# Altium PCB pcb3d.PcbDoc
Units mm, origin at the board's own origin, x right, y up, seen from the top; angles counter-clockwise.
Board outline 75.69 x 75.31 mm, 2 copper layers (Top Layer, Bottom Layer); 27 components, 26 nets, 122 pads, 8 vias.
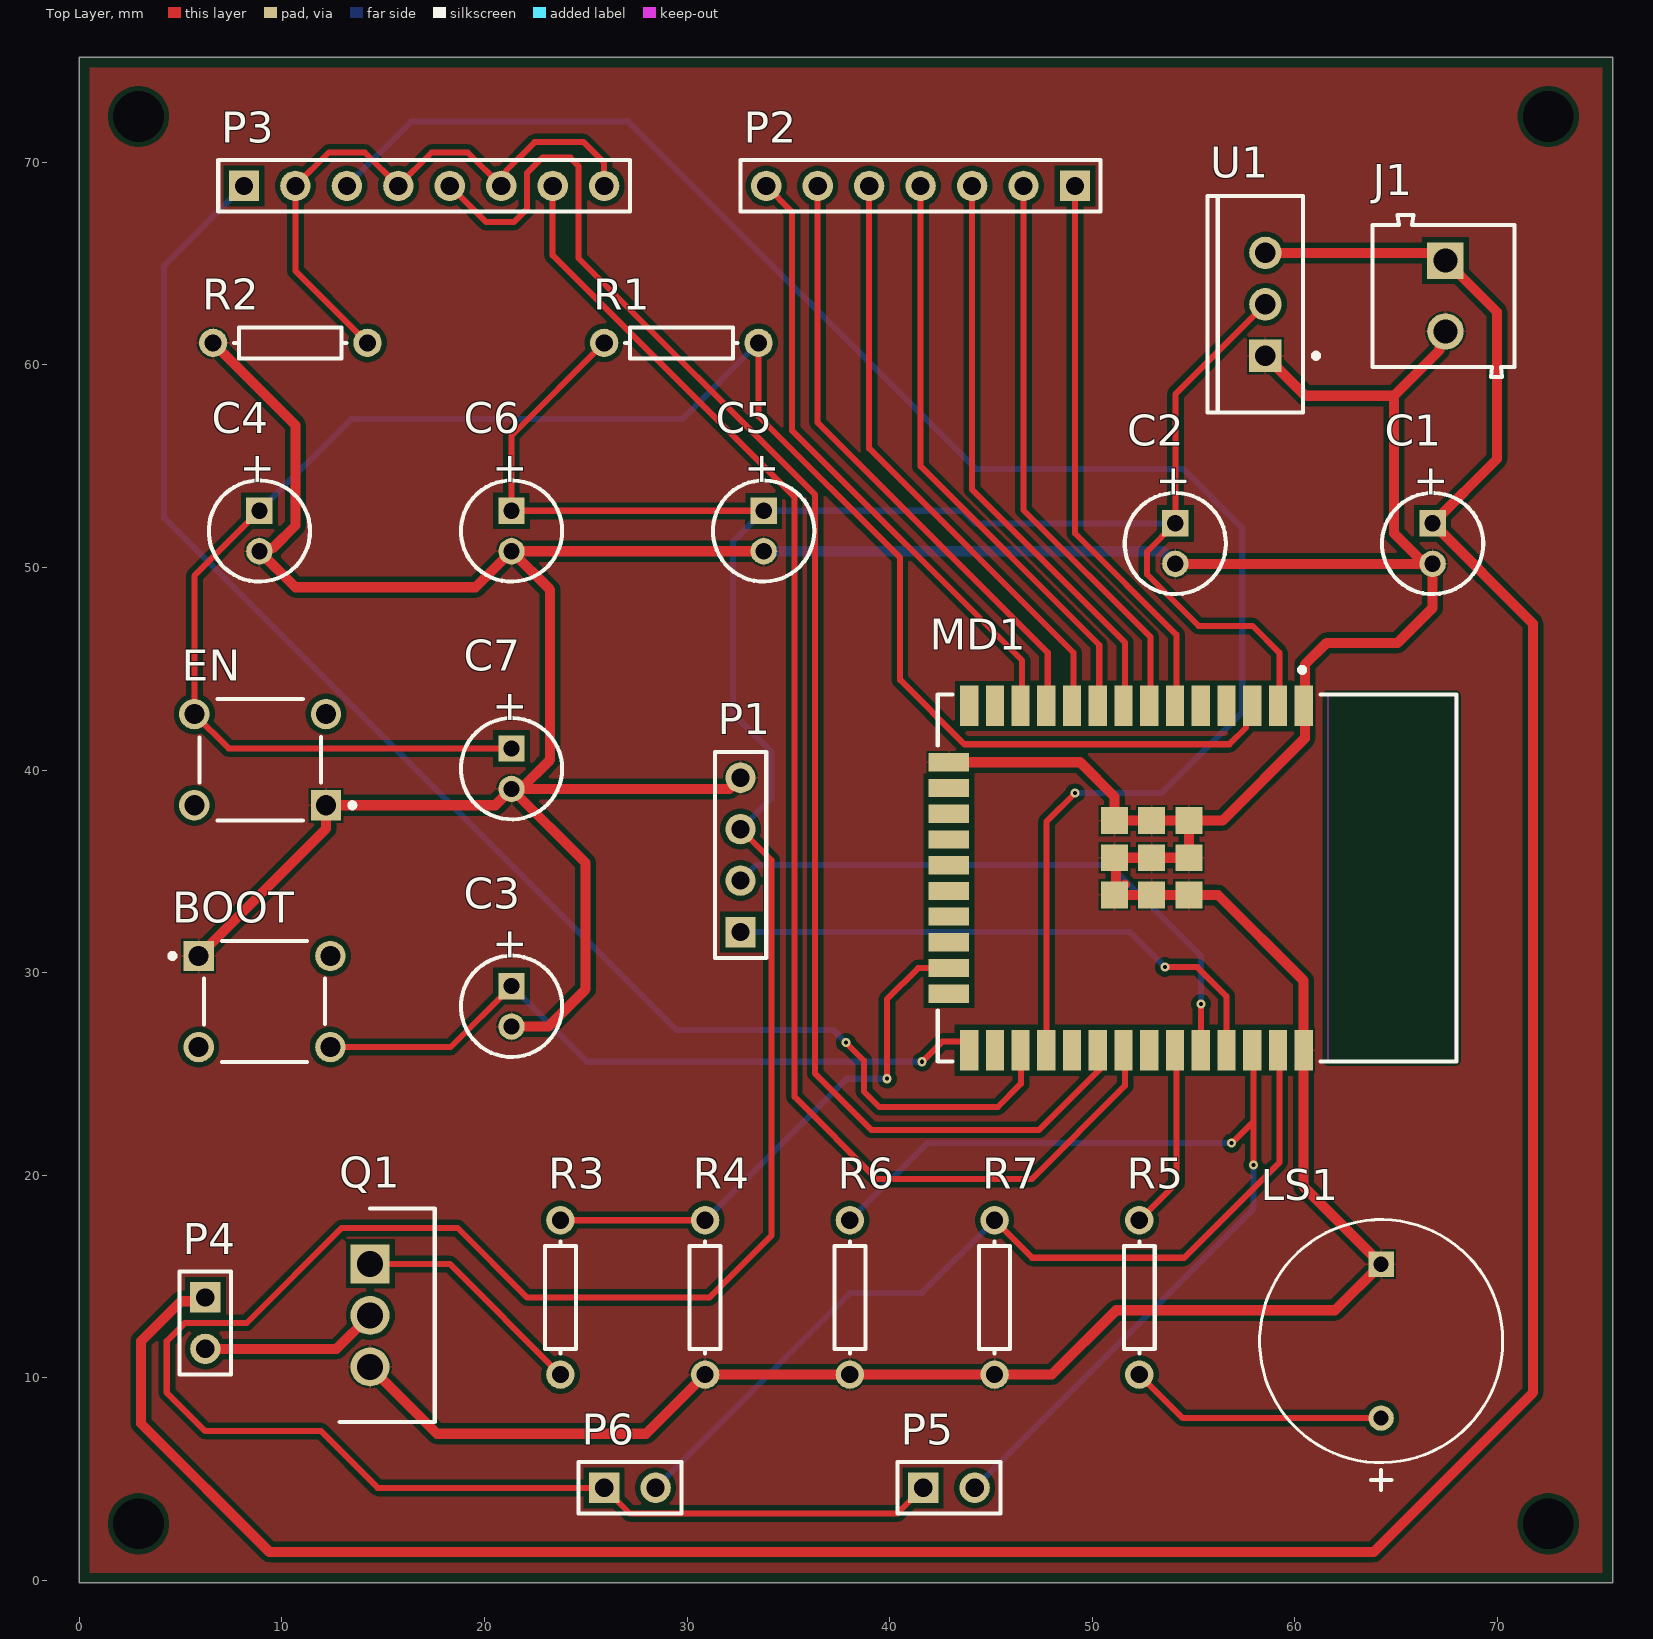
[diagram p0: Top Layer view]
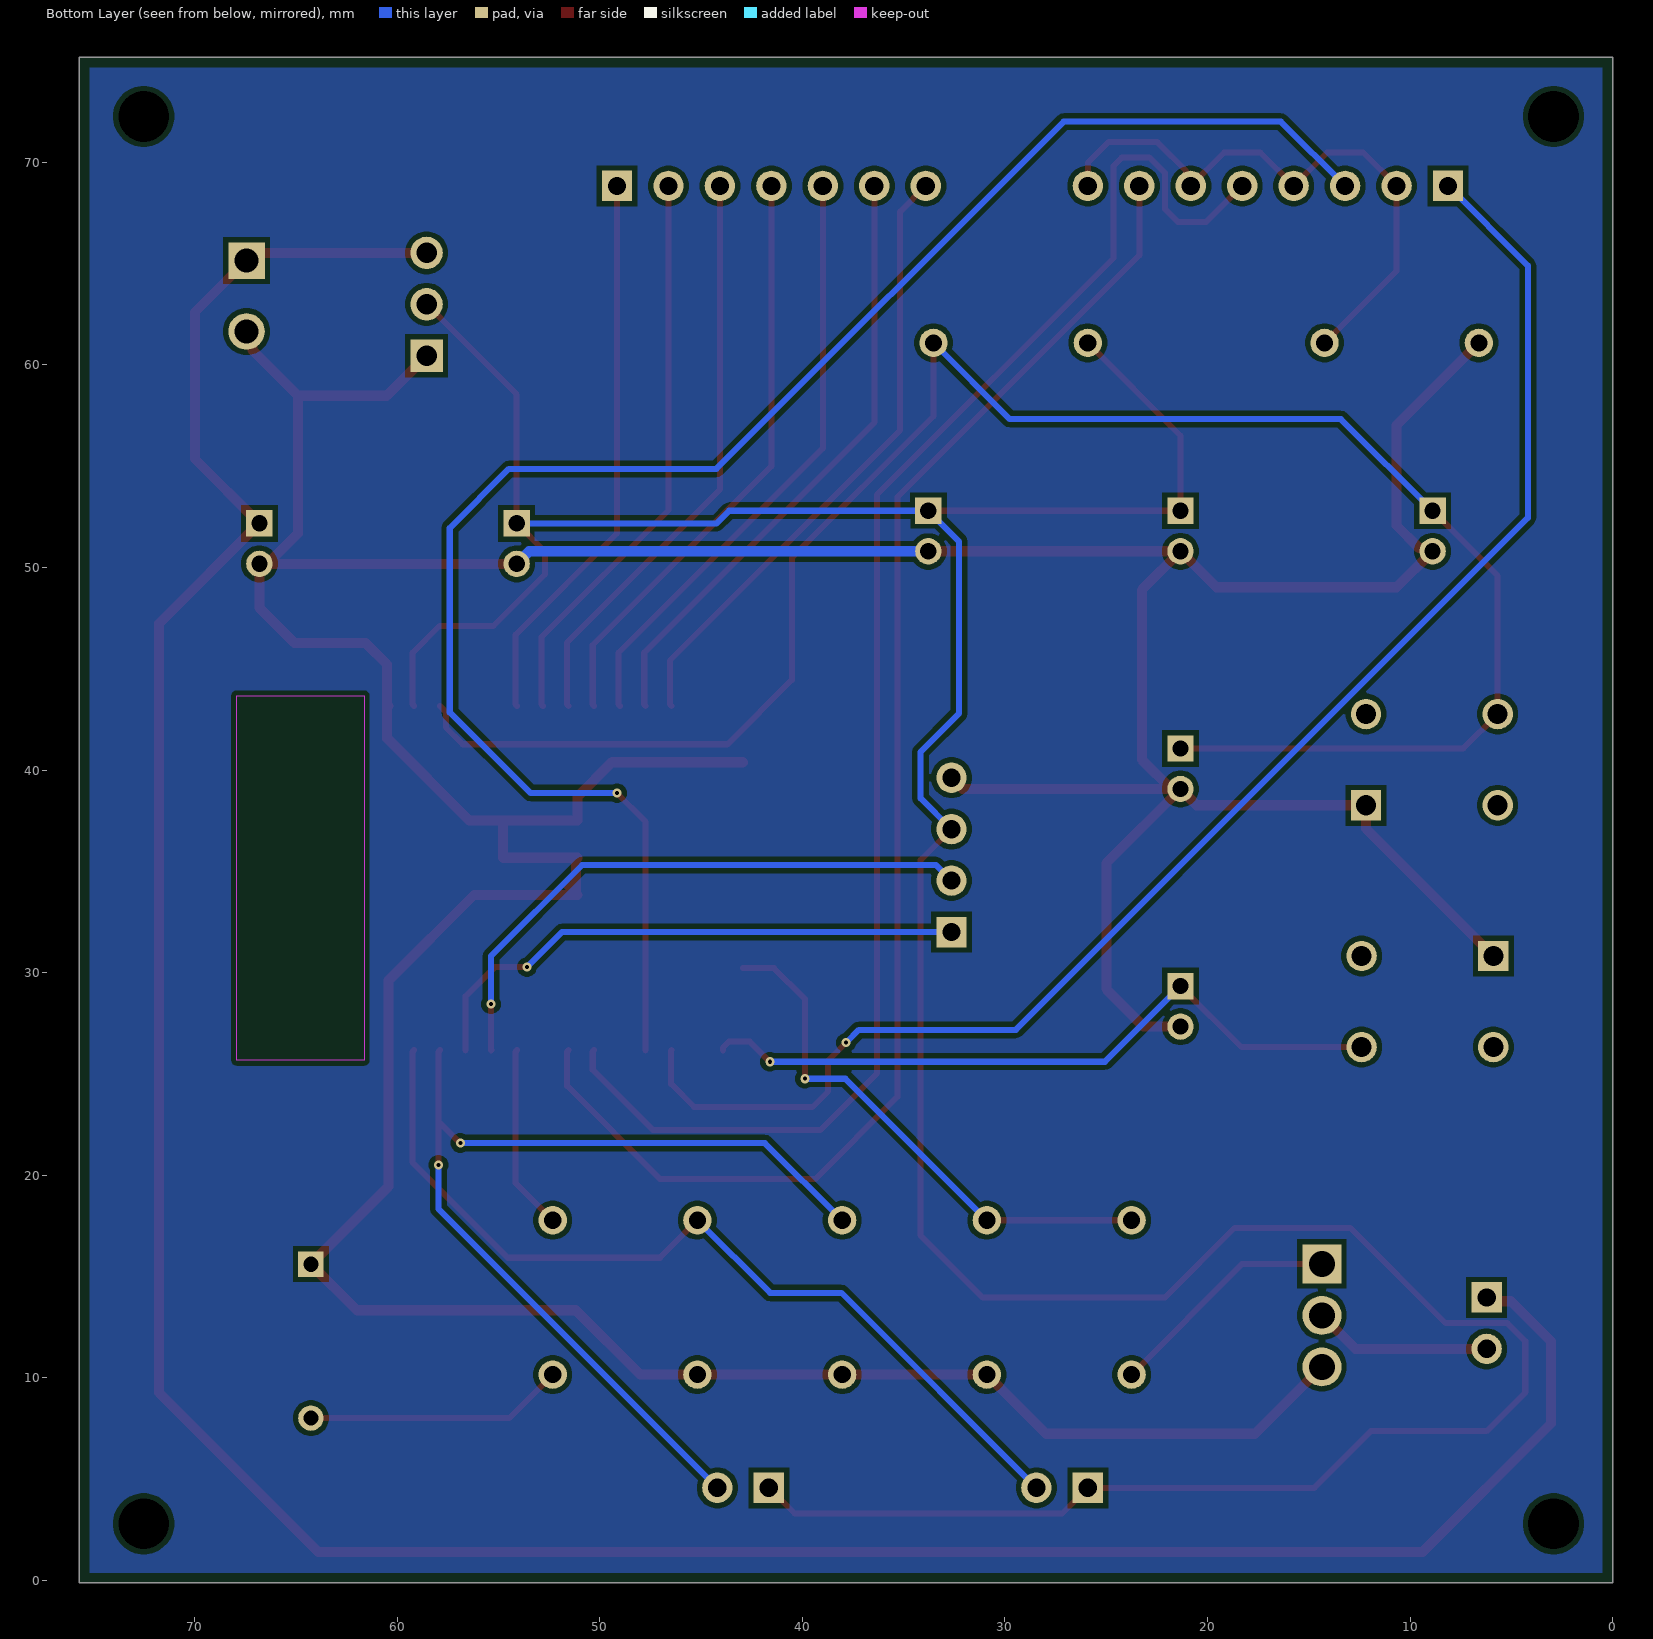
[diagram p1: Bottom Layer view, seen from below]

## Layer stack, top to bottom
Top Solder: solder mask 0.0102, Solder Resist, Dk 3.5
Top Layer: signal copper 0.0356
Dielectric 1: dielectric 0.32, FR-4, Dk 4.8
Bottom Layer: signal copper 0.0356
Bottom Solder: solder mask 0.0102, Solder Resist, Dk 3.5

## Board outline
0,-0.127 75.692,-0.127 75.692,75.184 0,75.184

## Design rules (kind name [scope] priority, off if disabled: settings)
BoardOutlineClearance [All] p1: gap=0.5 ignorepadtopadclearanceinfootprint=FALSE except(0.2: Text-OutlineEdge Text-CavityEdge Text-CutoutEdge Text-SplitBarrior Text-SplitContinuation)
Clearance [All] p1: gap=0.25 ignorepadtopadclearanceinfootprint=FALSE
ComponentClearance [All] p1: gap=0.102 collisioncheckmode=3 verticalgap=0.102 showdistances=TRUE donotcheckwithout3dbody=TRUE
DiffPairsRouting [All] p1: maxlimit=0.102 minlimit=0.102 mostfreqgap=0.102 toplayer_minwidth=0.102 toplayer_maxwidth=1816.048 toplayer_prefwidth=0.102 bottomlayer_minwidth=0.102 bottomlayer_maxwidth=1816.048 bottomlayer_prefwidth=0.102 maxuncoupledlength=12.7
Height [All] p1: minheight=0 maxheight=1816.048 prefheight=12.7
HoleSize [All] p1: absolutevalues=TRUE maxlimit=6.3 minlimit=0.2 maxpercent=80.000 minpercent=20.000
HoleToHoleClearance [All] p1: gap=0.25 allowstackedmicrovias=FALSE
MinimumAnnularRing [All] p1: minimumring=0.076
MinimumSolderMaskSliver [All] p1: minsoldermaskwidth=0
PlaneClearance [All] p1: clearance=0.102
PlaneConnect PlaneConnectPowerPads [InPadClass('PowerPads')] p1: planeconnectstyle=Direct reliefexpansion=0.508 reliefentries=4 reliefconductorwidth=0.254 reliefairgap=0.254
PlaneConnect [All] p2: pad.planeconnectstyle=Relief pad.reliefexpansion=0.3 pad.reliefentries=4 pad.reliefconductorwidth=0.102 pad.reliefairgap=0.102 via.planeconnectstyle=Direct via.reliefexpansion=0.3 via.reliefentries=4 via.reliefconductorwidth=0.127 via.reliefairgap=0.127
PolygonConnect PolygonConnectPowerPads [All vs (InPadClass('PowerPads'))] p1: connectstyle=Direct reliefconductorwidth=0.254 reliefentries=4 polygonreliefangle="90 Angle" airgapwidth=0.254
PolygonConnect [All] p2: thpad.connectstyle=Relief thpad.reliefconductorwidth=0.102 thpad.reliefentries=4 thpad.polygonreliefangle="90 Angle" thpad.airgapwidth=0.102 smdpad.connectstyle=Relief smdpad.reliefconductorwidth=0.102 smdpad.reliefentries=4 smdpad.polygonreliefangle="90 Angle" smdpad.airgapwidth=0.102 via.connectstyle=Direct via.reliefconductorwidth=0.127 via.reliefentries=4 via.polygonreliefangle="90 Angle" via.airgapwidth=0.127
RoutingVias [All] p1: holewidth=0.2 width=0.45 viastyle="Through Hole" minholewidth=0.2 minwidth=0.45 maxholewidth=6.3 maxwidth=6.55
SilkToSilkClearance [All] p1: silktosilkclearance=0
SilkToSolderMaskClearance [IsPad] p1: minsilkscreentomaskgap=0.102 clearancetoexposedcopper=TRUE
SolderMaskExpansion [All] p1: expansion=0.075 istentingtop=FALSE
Width [All] p1: maxlimit=1816.048 minlimit=0.102 preferedwidth=0.3 minimp=50.000000 maximp=50.000000 favimp=50.000000
20 further rules are at their usual default settings.

## Components (designator, comment, footprint, x,y, rotation, side; value= is the part's Value field where it differs from the comment)
BOOT "1825910-6" TECO-1825910-6_V 9.144,28.575 r0 top
C1 "22uF" CAPPR55-200-1100X500X1200 66.802,51.181 r270 top
C2 "22uF" CAPPR55-200-1100X500X1200 54.102,51.181 r270 top
C3 "0.1uF" CAPPR55-200-1100X500X1200 21.336,28.337 r270 top
C4 "0.1uF" CAPPR55-200-1100X500X1200 8.89,51.8 r270 top
C5 "22uF" CAPPR55-200-1100X500X1200 33.782,51.8 r270 top
C6 "0.1uF" CAPPR55-200-1100X500X1200 21.336,51.8 r270 top
C7 "1uF" CAPPR55-200-1100X500X1200 21.336,40.069 r270 top
EN "1825910-6" TECO-1825910-6_V 8.927,40.513 r180 top
J1 "Power in" 691103110002 67.337,63.401 r270 top
LS1 "Buzzer" FP-MCKPX-G1203A-K4056-MFG 64.262,11.811 r270 top
MD1 "ESP32-WROOM-32D" FP-ESP32-WROOM-32D-MFG 55.176,34.671 r270 top
P1 "FTDI" HDR1X4 32.639,32.004 r90 top
P2 "Keypad" HDR1X7 49.149,68.834 r180 top
P3 "LEDs" HDR1X8 8.128,68.834 r0 top
P4 "LOCK" HDR1X2 6.223,13.97 r270 top
P5 "PW reset button" HDR1X2 41.656,4.572 r0 top
P6 "WiFi config button" HDR1X2 25.908,4.572 r0 top
Q1 "IRL520NPBF" TO254P469X1042X1967-3P 14.351,15.621 r270 top
R1 "" AXIAL-0.3 29.718,61.087 r180 top value=10k
R2 "330" AXIAL-0.3 10.414,61.087 r180 top
R3 "" AXIAL-0.3 23.749,13.97 r90 top value=220
R4 "" AXIAL-0.3 30.893,13.97 r90 top value=100k
R5 "" AXIAL-0.3 52.324,13.97 r270 top value=220
R6 "" AXIAL-0.3 38.036,13.97 r270 top value=10k
R7 "" AXIAL-0.3 45.18,13.97 r270 top value=10k
U1 "LM1117T-3.3/NOPB" NDE0003A 58.547,62.992 r90 top

## Footprints (in the part's own frame and the unit in brackets; to place one, negate y for a bottom-side part, rotate by r counter-clockwise, add the part's x,y. Pads: shape width x height; smd on the part's side, far side on the other; paste and mask are expansions set on the pad)
691103110002 [mm] "3,50mm - modular - blue - Horizontal wire entry - Pressure clamp - 8,4mm height - 02p"
  rect 1.8x1.8 hole 1.2: 1(-1.75,0.1)
  round 1.8 hole 1.2: 2(1.75,0.1)
  silkscreen extent -4,-3.5 4,3.5, body extent -4,-3.5 4,3.5, height 8.45
AXIAL-0.3 [mm] "Axial Device, Thru-Hole; 2 Leads; 0.3 in Pin Spacing"
  round 1.4 hole 0.85: 1(-3.81,0) 2(3.81,0)
  silkscreen extent -2.77,-0.76 2.77,0.76
CAPPR55-200-1100X500X1200 [mm] "THD, 2-Leads, Dia 5mm, Body Length 11mm"
  rect 1.3x1.3 hole 0.8: 1(-1,0)
  round 1.3 hole 0.8: 2(1,0)
  silkscreen extent -2.5,-2.5 2.5,2.5, body extent -2.5,-2.5 2.5,2.5, height 12
FP-ESP32-WROOM-32D-MFG [mm]
  rect 2x0.9 smd paste+0 mask+0: 1(-8.5,5.26) 2(-8.5,3.99) 3(-8.5,2.72) 4(-8.5,1.45) 5(-8.5,0.18) 6(-8.5,-1.09) 7(-8.5,-2.36) 8(-8.5,-3.63) 9(-8.5,-4.9) 10(-8.5,-6.17) 11(-8.5,-7.44) 12(-8.5,-8.71) 13(-8.5,-9.98) 14(-8.5,-11.25) 25(8.5,-11.25) 26(8.5,-9.98) 27(8.5,-8.71) 28(8.5,-7.44) 29(8.5,-6.17) 30(8.5,-4.9) 31(8.5,-3.63) 32(8.5,-2.36) 33(8.5,-1.09) 34(8.5,0.18) 35(8.5,1.45) 36(8.5,2.72) 37(8.5,3.99) 38(8.5,5.26)
  rect 0.9x2 smd paste+0 mask+0: 15(-5.715,-12.25) 16(-4.445,-12.25) 17(-3.175,-12.25) 18(-1.905,-12.25) 19(-0.635,-12.25) 20(0.635,-12.25) 21(1.905,-12.25) 22(3.175,-12.25) 23(4.445,-12.25) 24(5.715,-12.25)
  rect 1.33x1.33 smd paste+0 mask+0: 39(-2.835,-0.405) 39(-2.835,-2.24) 39(-2.835,-4.075) 39(-1,-0.405) 39(-1,-2.24) 39(-1,-4.075) 39(0.835,-0.405) 39(0.835,-2.24) 39(0.835,-4.075)
  Keep-Out Layer region: -9,6.45 9,6.45 9,12.75 -9,12.75
  Keep-Out Layer region: -9,6.45 9,6.45 9,12.75 -9,12.75
  silkscreen extent -10.4,-12.8 9.05,12.8, body extent -9.6,-13.35 9.6,12.9, height 0.25
FP-MCKPX-G1203A-K4056-MFG [mm]
  rect 1.25x1.25 hole 0.75 paste-1000 mask+0: 1(-3.8,0)
  round 1.25 hole 0.75 paste-1000 mask+0: 2(3.8,0)
  silkscreen extent -6,-6 7.35,6, body extent -6.1,-6.1 6.1,6.1, height 0.25
HDR1X2 [mm] "Connector; Header; 2 Position"
  rect 1.5x1.5 hole 0.9: 1(0,0)
  round 1.5 hole 0.9: 2(2.54,0)
  silkscreen extent -1.27,-1.27 3.81,1.27
HDR1X4 [mm] "Connector; Header; 4 Position"
  rect 1.5x1.5 hole 0.9: 1(0,0)
  round 1.5 hole 0.9: 2(2.54,0) 3(5.08,0) 4(7.62,0)
  silkscreen extent -1.27,-1.27 8.89,1.27
HDR1X7 [mm] "Connector; Header; 7 Position"
  rect 1.5x1.5 hole 0.9: 1(0,0)
  round 1.5 hole 0.9: 2(2.54,0) 3(5.08,0) 4(7.62,0) 5(10.16,0) 6(12.7,0) 7(15.24,0)
  silkscreen extent -1.27,-1.27 16.51,1.27
HDR1X8 [mm] "Connector; Header; 8 Position"
  rect 1.5x1.5 hole 0.9: 1(0,0)
  round 1.5 hole 0.9: 2(2.54,0) 3(5.08,0) 4(7.62,0) 5(10.16,0) 6(12.7,0) 7(15.24,0) 8(17.78,0)
  silkscreen extent -1.27,-1.27 19.05,1.27
NDE0003A [mm] "FM, 3-Leads, Body 10.7x4.7mm, Pitch 2.54mm"
  rect 1.6x1.6 hole 1: 1(-2.54,0)
  round 1.6 hole 1: 2(0,0) 3(2.54,0)
  silkscreen extent -5.35,-2.63 5.35,2.85, body extent -5.4,-1.9 5.4,2.9, height 19.4
TECO-1825910-6_V [mm] "Switch, 4-Leads, Body 5.99x5.99mm"
  rect 1.5x1.5 hole 0.99: 1(-3.25,2.25)
  round 1.5 hole 0.99: 2(3.25,2.25) 3(-3.25,-2.25) 4(3.25,-2.25)
  silkscreen extent -4.67,-3 3,3, body extent -3,-2.99 2.99,3, height 5
TO254P469X1042X1967-3P [mm]
  rect 1.92x1.92 hole 1.28: 1(0,0)
  round 1.92 hole 1.28: 2(2.54,0) 3(5.08,0)
  silkscreen extent -2.73,-1.49 7.81,3.2, body extent -2.67,-1.5 7.75,3.19, height 18.84

## Part data
BOOT EN: library part CMP-1684-00021-1, "Tact Switch, SPST-NO, 0.05 A, -35 to 85 degC, 4-Pin THD, RoHS, Bulk", Actuator Color=Black, Contact Rating @ Voltage=0.05A@24VDC, Dielectric Strength=500VAC, Manufacturer="TE Connectivity", Maximum AC Voltage Rating=N/A, Maximum Contact Resistance=100mOhm, Maximum DC Voltage Rating=24V, Minimum Insulation Resistance=100MOhm, Operating Temperature=-35to85C, Package Description="4-Pin Through Hole Device, Body 5.99 x 5.99 mm, Pitch 6.5 mm", Package Reference=THD, Actuator Length=1.4mm, Actuator Material=PolybutyleneTerephthalate, Actuator Style=RoundButton, Base Material=N/A, Body Orientation=Straight, Bushing Type=Unthreaded, Contact Material=CopperAlloy, Contact Plating=Silver, Datasheet URL=http://www.te.com/commerce/DocumentDelivery/DDEController?Action=showdoc&DocId=Customer+Drawing%7F1825910%7FC9%7Fpdf%7FEnglish%7FENG_CD_1825910_C9.pdf%7F1825910-6, Datasheet Version="Rev. C9", Dimension=5.99x5mm, Electrical Life=100000Cycles, Family=1825910, Function=MomentaryContact, Housing Material=N/A, Illumination=N/R, Manufacturer URL=http://www.te.com, Mechanical Life=100000Cycles, Mounting=ThroughHole, Packaging=N/A, Part No=1825910-6, Pole Throw Configuration=SPST, Product Weight=N/A, RoHS=Yes, Seal Description=N/A, Seal Location=N/A, Switch Configuration=OFF(ON), Terminal Type=PCPins, Thread Size=N/R
C1 C2 C5: library part CMP-1665-00036-2, "Aluminum Electrolytic Capacitor, 22 uF, +/- 20%, 50 V, -40 to 85 degC, 2-Pin THD, RoHS, Bulk", Case/Package=Radial, Leakage Current=3uA, Manufacturer=Panasonic, Max Operating Temperature=85degC, Min Operating Temperature=-40degC, Package Description="2-Pin Radial Lead, Dia 5 mm, Height 12 mm", Package Quantity=200, Package Reference=CAPPR55-200-1100X500X1200, Ripple Current=100mA, Tolerance=20%, Voltage=50V, Capacitance=22uF, Datasheet URL=https://industrial.panasonic.com/cdbs/www-data/pdf/RDF0000/ABA0000C1218.pdf, Datasheet Version="Rev. 05, 10/2016", Diameter=5mm, Dissipation Factor=0.12%, Height=11mm, Height - Seated (Max)=0.472inch, Lead Diameter=0.5mm, Lead Pitch=2mm, Lead/Base Style=Straight, Length=11mm, Life (Hours)=2000Hour, Manufacturer URL=http://www.panasonic.com/, Mount=ThroughHole, Packaging=Bulk, Radiation Hardening=No, REACH SVHC=NoSVHC, Ripple Current (AC)=100mA, RoHSCompliant=true, Termination=Radial, Voltage Rating=50V, Voltage Rating (DC)=50V
C3 C4 C6 C7: library part CMP-1665-00036-2, "Aluminum Electrolytic Capacitor, 22 uF, +/- 20%, 50 V, -40 to 85 degC, 2-Pin THD, RoHS, Bulk", Capacitance=22uF, Case/Package=Radial, Leakage Current=3uA, Manufacturer=Panasonic, Max Operating Temperature=85degC, Min Operating Temperature=-40degC, Package Description="2-Pin Radial Lead, Dia 5 mm, Height 12 mm", Package Quantity=200, Package Reference=CAPPR55-200-1100X500X1200, Ripple Current=100mA, Tolerance=20%, Voltage=50V, Datasheet URL=https://industrial.panasonic.com/cdbs/www-data/pdf/RDF0000/ABA0000C1218.pdf, Datasheet Version="Rev. 05, 10/2016", Diameter=5mm, Dissipation Factor=0.12%, Height=11mm, Height - Seated (Max)=0.472inch, Lead Diameter=0.5mm, Lead Pitch=2mm, Lead/Base Style=Straight, Length=11mm, Life (Hours)=2000Hour, Manufacturer URL=http://www.panasonic.com/, Mount=ThroughHole, Packaging=Bulk, Radiation Hardening=No, REACH SVHC=NoSVHC, Ripple Current (AC)=100mA, RoHSCompliant=true, Termination=Radial, Voltage Rating=50V, Voltage Rating (DC)=50V
J1: library part CMP-1502-03254-1, "Series 1031 - 3.50 mm Horizontal Entry Modular with Pressure Clamp WR-TBL, 2 pin", Manufacturer="Wurth Elektronik", Operating Temperature=-40to105degC, Package Reference=691103110002, Datasheet URL=http://katalog.we-online.de/em/datasheet/6911031100xx.pdf, Manufacturer URL=http://www.we-online.de, Mounting Technology=THT, Packaging=Box, Part Number=691103110002, Pin Number=2, Pitch=3.50mm, Publisher=WurthElektronik
LS1: library part CMP-12433-000001-1, "MAGNETIC BUZZER AND TRANSDUCER - More Details", Current=30mA, Frequency=2300Hz, Manufacturer="Multicomp Pro", Manufacturer Part Number=MCKPX-G1203A-K4056, Max Supply Voltage=5V, Min Supply Voltage=2V, Operating Supply Voltage=3V, Package=0, Temperature="-20°C to +70°C", Temperature Range High=+70°C, Temperature Range Low=-20°C, Automotive=No, Category=Speak, ComponentLink2Description=Datasheet, ComponentLink2URL=http://www.farnell.com/datasheets/1498149.pdf?_ga=2.17855225.1157923166.1572356775-536200964.1569240579, Device Class L1=Electromechanical, Device Class L2="Audio Products", Device Class L3=Buzzers, Height=9.5mm, Lead Free=Yes, Octopart=https://octopart.com/mckpx-g1203a-k4056-multicomp-12157154, RoHS=TRUE, Standoff Height=0.5mm
MD1: library part CMP-194065-000003-1, "WIFI MODULE 32MBITS SPI FLASH", Manufacturer="Espressif Systems", Max Frequency=2484MHz, Max Supply Voltage=3.6V, Min Supply Voltage=3V, Nominal Supply Current=500mA, Temperature="-40°C to +85°C", Temperature Range High=+85°C, Temperature Range Low=-40°C, Automotive=No, Bandwidth=72MHz, Category=UNK, ComponentLink2Description=Datasheet, ComponentLink2URL=https://www.espressif.com/sites/default/files/documentation/esp32-wroom-32d_esp32-wroom-32u_datasheet_en.pdf, Data Rate=150Mbits/s, Device Class L1="Integrated Circuits (ICs)", Device Class L2="RF Semiconductors and Devices", Device Class L3=Transceivers, Digikey Description="WIFI MODULE 32MBITS SPI FLASH", Height=3.2mm, Interface=I2C,SPI,UART,Ethernet,I2S,Other, Lead Free=Yes, Manufacturer Part Number=ESP32-WROOM-32D, Mouser Description="Wi-Fi/BT BLE Module ESP32-D0WD, SPI Flash, UART, P", Number Of Adc Channels=16, Number Of Gpio=32, Octopart=https://octopart.com/esp32-wroom-32d-espressif+systems-91040050, Package=ESP32-WROOM-32D, RoHS=TRUE, Sensitivity=-98dBm
P1: library part "Header 4", "Header, 4-Pin", LatestRevisionDate=17-Jul-2002, LatestRevisionNote="Re-released for DXP Platform.", Publisher="Altium Limited"
P2: library part "Header 7", "Header, 7-Pin", LatestRevisionDate=17-Jul-2002, LatestRevisionNote="Re-released for DXP Platform.", Publisher="Altium Limited"
P3: library part "Header 8", "Header, 8-Pin", LatestRevisionDate=17-Jul-2002, LatestRevisionNote="Re-released for DXP Platform.", Publisher="Altium Limited"
P4 P5 P6: library part "Header 2", "Header, 2-Pin", LatestRevisionDate=17-Jul-2002, LatestRevisionNote="Re-released for DXP Platform.", Publisher="Altium Limited"
Q1: "MOSFET (N-Channel)", Manufacturer_Name=Infineon, Mouser Part Number=942-IRL520NPBF, Arrow Part Number=IRL520NPBF, Arrow Price/Stock=https://www.arrow.com/en/products/irl520npbf/infineon-technologies-ag?region=nac, Datasheet Link=https://www.infineon.com/dgdl/irl520npbf.pdf?fileId=5546d462533600a40153565f9b62255b, Height=4.69mm, Manufacturer_Part_Number=IRL520NPBF, Mouser Price/Stock=https://www.mouser.co.uk/ProductDetail/Infineon-Technologies/IRL520NPBF?qs=9%252BKlkBgLFf3eZ5ppEpIaKQ%3D%3D
R1 R2 R3 R4 R5 R6 R7: library part Res1, "Resistor", LatestRevisionDate=17-Jul-2002, LatestRevisionNote="Re-released for DXP Platform.", PackageDescription="Axial Device, Thru-Hole; 2 Leads; 0.3 in Pin Spacing", PackageReference=AXIAL-0.3, Published=8-Jun-2000, Publisher="Altium Limited"
U1: library part CMP-0062-02494-3, "800mA Low-Dropout Linear Regulator, 3-pin TO-220, Pb-Free", Manufacturer="Texas Instruments", PackageTopMarking=NSUZXYTTE#*LM1117T*3.3, PowerWise=N, ComponentLink1Description="Datasheet URL", ComponentLink1URL=http://www.ti.com/general/docs/lit/getliterature.tsp?genericPartNumber=LM1117-N&fileType=pdf, CompType="LDO IC", PackageDescription="TO-220, Molded, 3 Lead, Straight", PackageReference=NDE0003A, PinCount=3, RoHS=Y

## Free pads (board coordinates)
  round 0 hole 2.5: 2(2.921,72.263) 3(72.517,72.263) 4(72.517,2.794) 5(2.921,2.794)

## Via types
v1: diameter 0.45, hole 0.2, Top Layer to Bottom Layer, 8 vias

## Nets (pads, with @x,y where several pads share a name; then routed paths per layer and width w, separated by ;. In a path a pad name is that pad's centre, name@x,y a point inside that pad or via, vN(x,y) a via of type N, cw(c..) or ccw(c..) an arc to the next point about the centre after c; other vN are vias at no path point)
3V3: C2.1 C5.1 C6.1 MD1.2 P1.3 P5.1 P6.1 R1.2 U1.2 | length 185.9
  Top Layer w0.3: R1.2 21.336,56.515 C6.1 C5.1 ; P1.3 34.163,35.56 34.163,17.018 31.115,13.97 22.098,13.97 18.669,17.399 12.954,17.399 8.255,12.7 5.207,12.7 4.318,11.811 4.318,9.271 6.223,7.366 11.938,7.366 14.732,4.572 P6.1 27.178,3.302 40.386,3.302 P5.1 ; U1.2 54.102,58.547 C2.1 52.705,50.784 52.705,49.657 55.245,47.117 57.912,47.117 59.235,45.794 59.235,43.24 MD1.2
  Bottom Layer w0.3: P1.3 34.163,38.608 34.163,40.894 32.258,42.799 32.258,51.276 C5.1 43.612,52.8 44.231,52.181 C2.1
BOOT: BOOT.4 C3.1 MD1.25 | length 35
  Top Layer w0.3: BOOT.4 18.324,26.325 C3.1 ; v1(41.605,25.603) 42.596,26.594 43.626,26.594 43.926,26.294 MD1.25
  Bottom Layer w0.3: C3.1 25.07,25.603 v1(41.605,25.603)
BUZZER: MD1.33 R5.1 | length 9.2
  Top Layer w0.3: R5.1 54.155,19.611 54.155,26.102 MD1.33
C1: MD1.10 P2.5 | length 29.9
  Top Layer w0.3: P2.5 38.989,55.88 49.075,45.794 49.075,43.24 MD1.10
C2: MD1.11 P2.6 | length 30.4
  Top Layer w0.3: P2.6 36.449,57.15 47.805,45.794 47.805,43.24 MD1.11
C3: MD1.12 P2.7 | length 30.9
  Top Layer w0.3: P2.7 35.179,67.564 35.179,56.769 46.535,45.413 46.535,43.24 MD1.12
EN: C4.1 C7.1 EN.4 MD1.3 R1.1 | length 95.3
  Top Layer w0.3: C4.1 5.677,49.587 EN.4 7.371,41.068 C7.1 ; R1.1 33.528,57.455 40.513,50.47 40.513,44.45 43.688,41.275 56.769,41.275 57.596,42.102 57.596,42.871 MD1.3
  Bottom Layer w0.3: C4.1 13.418,57.328 29.769,57.328 R1.1
GND: BOOT.1 C1.2 C2.2 C3.2 C4.2 C5.2 C6.2 C7.2 EN.1 J1.2 LS1.1 MD1.1 MD1.15 MD1.38 MD1.39 P1.4 Q1.3 R2.2 R4.1 R6.2 R7.2 U1.1 | length 276.9
  Top Layer w0.5: BOOT.1 12.177,37.108 EN.1 20.531,38.263 C7.2 ; R2.2 10.668,57.023 10.668,52.07 9.551,50.953 9.043,50.953 C4.2 10.668,49.022 19.558,49.022 C6.2 ; Q1.3 17.653,7.239 27.972,7.239 R4.1 R6.2 R7.2 48.006,10.16 51.181,13.335 61.986,13.335 LS1.1 60.436,19.437 60.436,29.607 56.207,33.836 52.936,33.836 51.101,33.836 MD1.39@51.181,33.916 ; C3.2 23.146,27.337 24.994,29.185 24.994,35.411 C7.2 ; P1.4 32.084,39.069 C7.2@21.797,39.069 ; C5.2 C6.2 ; MD1.15 49.403,40.386 51.101,38.688 51.101,37.506 52.936,37.506 MD1.39@54.771,37.506 ; MD1.39@51.616,34.351 MD1.39@51.181,33.916 ; C2.2 C1.2@66.405,50.181 ; U1.1 60.519,58.48 64.897,58.48 ; J1.2 67.15,61.364 67.15,60.733 64.897,58.48 ; C7.2 C7.2@21.797,39.069 ; C6.2 23.241,48.895 23.241,40.513 C7.2@21.797,39.069 ; MD1.39@51.181,33.916 51.181,35.591 51.101,35.671 52.936,35.671 54.771,35.671 MD1.39@54.771,37.506 ; MD1.39@54.771,37.506 56.429,37.506 60.494,41.571 60.494,43.113 MD1.1 60.505,43.24 60.505,45.216 61.57,46.281 65.077,46.281 66.802,48.006 C1.2 C1.2@66.405,50.181 ; 64.897,58.48 64.897,51.689 C1.2@66.405,50.181
  Bottom Layer w0.5: C5.2 53.483,50.8 C2.2
LOCK_CTRL: MD1.23 R3.2 R4.2 | length 26.6
  Top Layer w0.3: R3.2 R4.2 ; v1(39.878,24.765) 39.878,28.702 41.402,30.226 MD1.23
  Bottom Layer w0.3: R4.2 37.878,24.765 v1(39.878,24.765)
LOCK_G: MD1.28 P3.3 | length 86.1
  Top Layer w0.3: MD1.28 47.736,37.449 v1(49.149,38.862)
  Bottom Layer w0.3: P3.3 16.383,72.009 27.102,72.009 44.247,54.864 54.483,54.864 57.404,51.943 57.404,42.85 53.416,38.862 v1(49.149,38.862)
LOCK_R: MD1.27 P3.1 | length 75.4
  Top Layer w0.3: v1(37.846,26.543) 38.735,25.654 38.735,24.13 39.497,23.368 45.339,23.368 46.482,24.511 46.482,26.155 MD1.27
  Bottom Layer w0.3: P3.1 4.191,64.897 4.191,52.451 29.464,27.178 37.211,27.178 v1(37.846,26.543)
NetLS1_2: LS1.2 R5.2 | length 12.8
  Top Layer w0.3: R5.2 54.473,8.011 LS1.2
NetP3_2: P3.2 P3.4 P3.6 P3.8 R2.1 | length 30
  Top Layer w0.3: R2.1 10.668,64.643 P3.2 12.319,70.485 14.097,70.485 P3.4 17.399,70.485 19.177,70.485 P3.6 21.058,69.064 21.058,69.572 22.479,70.993 24.892,70.993 25.908,69.977 P3.8
NetP4_2: P4.2 Q1.2 | length 8.8
  Top Layer w0.5: P4.2 12.7,11.43 Q1.2
NetQ1_1: Q1.1 R3.1 | length 11.7
  Top Layer w0.3: Q1.1 18.288,15.621 R3.1
R1: MD1.6 P2.1 | length 27.8
  Top Layer w0.3: P2.1 49.149,51.689 54.155,46.683 54.155,43.24 MD1.6
R2: MD1.7 P2.2 | length 28.3
  Top Layer w0.3: P2.2 46.609,52.832 52.885,46.556 52.885,43.24 MD1.7
R3: MD1.8 P2.3 | length 28.8
  Top Layer w0.3: P2.3 44.069,53.848 51.615,46.302 51.615,43.24 MD1.8
R4: MD1.9 P2.4 | length 29.3
  Top Layer w0.3: P2.4 41.529,54.991 50.345,46.175 50.345,43.24 MD1.9
RESET_PW: MD1.36 P5.2 R6.1 | length 49.3
  Top Layer w0.3: v1(56.884,21.59) 57.965,22.671 ; MD1.36 57.965,26.102 57.965,22.671 ; v1(57.965,20.509) 57.965,22.671
  Bottom Layer w0.3: R6.1 41.846,21.59 v1(56.884,21.59) ; P5.2 57.965,18.341 v1(57.965,20.509)
RXD: MD1.34 P1.2 | length 29.6
  Top Layer w0.3: MD1.34 55.372,26.187 v1(55.372,28.448)
  Bottom Layer w0.3: P1.2 33.401,35.306 50.876,35.306 55.372,30.81 v1(55.372,28.448)
TXD: MD1.35 P1.1 | length 28
  Top Layer w0.3: v1(53.594,30.277) 55.194,30.277 56.626,28.845 MD1.35
  Bottom Layer w0.3: P1.1 51.867,32.004 v1(53.594,30.277)
VIN: C1.1 J1.1 P4.1 U1.3 | length 152.1
  Top Layer w0.5: P4.1 6.032,13.779 5.016,13.779 3.048,11.811 3.048,7.747 9.398,1.397 63.881,1.397 71.755,9.271 71.755,47.228 C1.1 69.977,55.356 69.977,62.611 J1.1 67.056,65.532 U1.3
WIFI_CONF: MD1.37 P6.2 R7.1 | length 44.5
  Top Layer w0.3: R7.1 47.034,15.926 54.534,15.926 59.235,20.627 59.235,26.102 MD1.37
  Bottom Layer w0.3: P6.2 38.068,14.192 41.593,14.192 R7.1
WIFI_G: MD1.31 P3.7 | length 71.6
  Top Layer w0.3: P3.7 23.368,65.405 35.306,53.467 35.306,23.876 39.37,19.812 47.018,19.812 51.615,24.409 51.615,26.102 MD1.31
WIFI_R: MD1.30 P3.5 | length 76.7
  Top Layer w0.3: P3.5 20.066,67.056 21.463,67.056 22.098,67.691 22.098,69.469 22.86,70.231 24.235,70.231 24.638,69.828 24.638,65.278 36.322,53.594 36.322,25.019 39.116,22.225 47.371,22.225 50.345,25.199 50.345,26.102 MD1.30
pads on no net: BOOT.2 BOOT.3 EN.2 EN.3 MD1.4 MD1.5 MD1.13 MD1.14 MD1.16 MD1.17 MD1.18 MD1.19 MD1.20 MD1.21 MD1.22 MD1.24 MD1.26 MD1.29 MD1.32

## Polygon pours and split planes (outlines as drawn)
no net on Bottom Layer "NONET_L02_P002" (solid, pour order 2): 0,75.057 75.565,75.057 75.565,0.127 75.692,0 75.438,-0.254 0,-0.254
GND on Top Layer "GND_L01_P001" (solid, pour order 1): 0.127,75.184 0.254,75.311 75.692,75.311 75.692,0.127 75.946,-0.127 75.819,-0.254 0,-0.254

## Text inside footprints (layer, text, board x,y; h text height)
C1: Top Overlay "+" at 66.065,55.089 h1.5 r270
C2: Top Overlay "+" at 53.365,55.089 h1.5 r270
C3: Top Overlay "+" at 20.599,32.245 h1.5 r270
C4: Top Overlay "+" at 8.153,55.708 h1.5 r270
C5: Top Overlay "+" at 33.045,55.708 h1.5 r270
C6: Top Overlay "+" at 20.599,55.708 h1.5 r270
C7: Top Overlay "+" at 20.599,43.977 h1.5 r270